# Altium PCB STM32_PCB.PcbDoc
Units mm, origin at the board's own origin, x right, y up, seen from the top; angles counter-clockwise.
Board outline 35 x 36 mm, 4 copper layers (L1 (SIGNAL), L2 (GND), L3 (GND), L4 (SIGNAL)), stack 1.57 mm thick; 35 components, 27 nets, 172 pads, 109 vias.
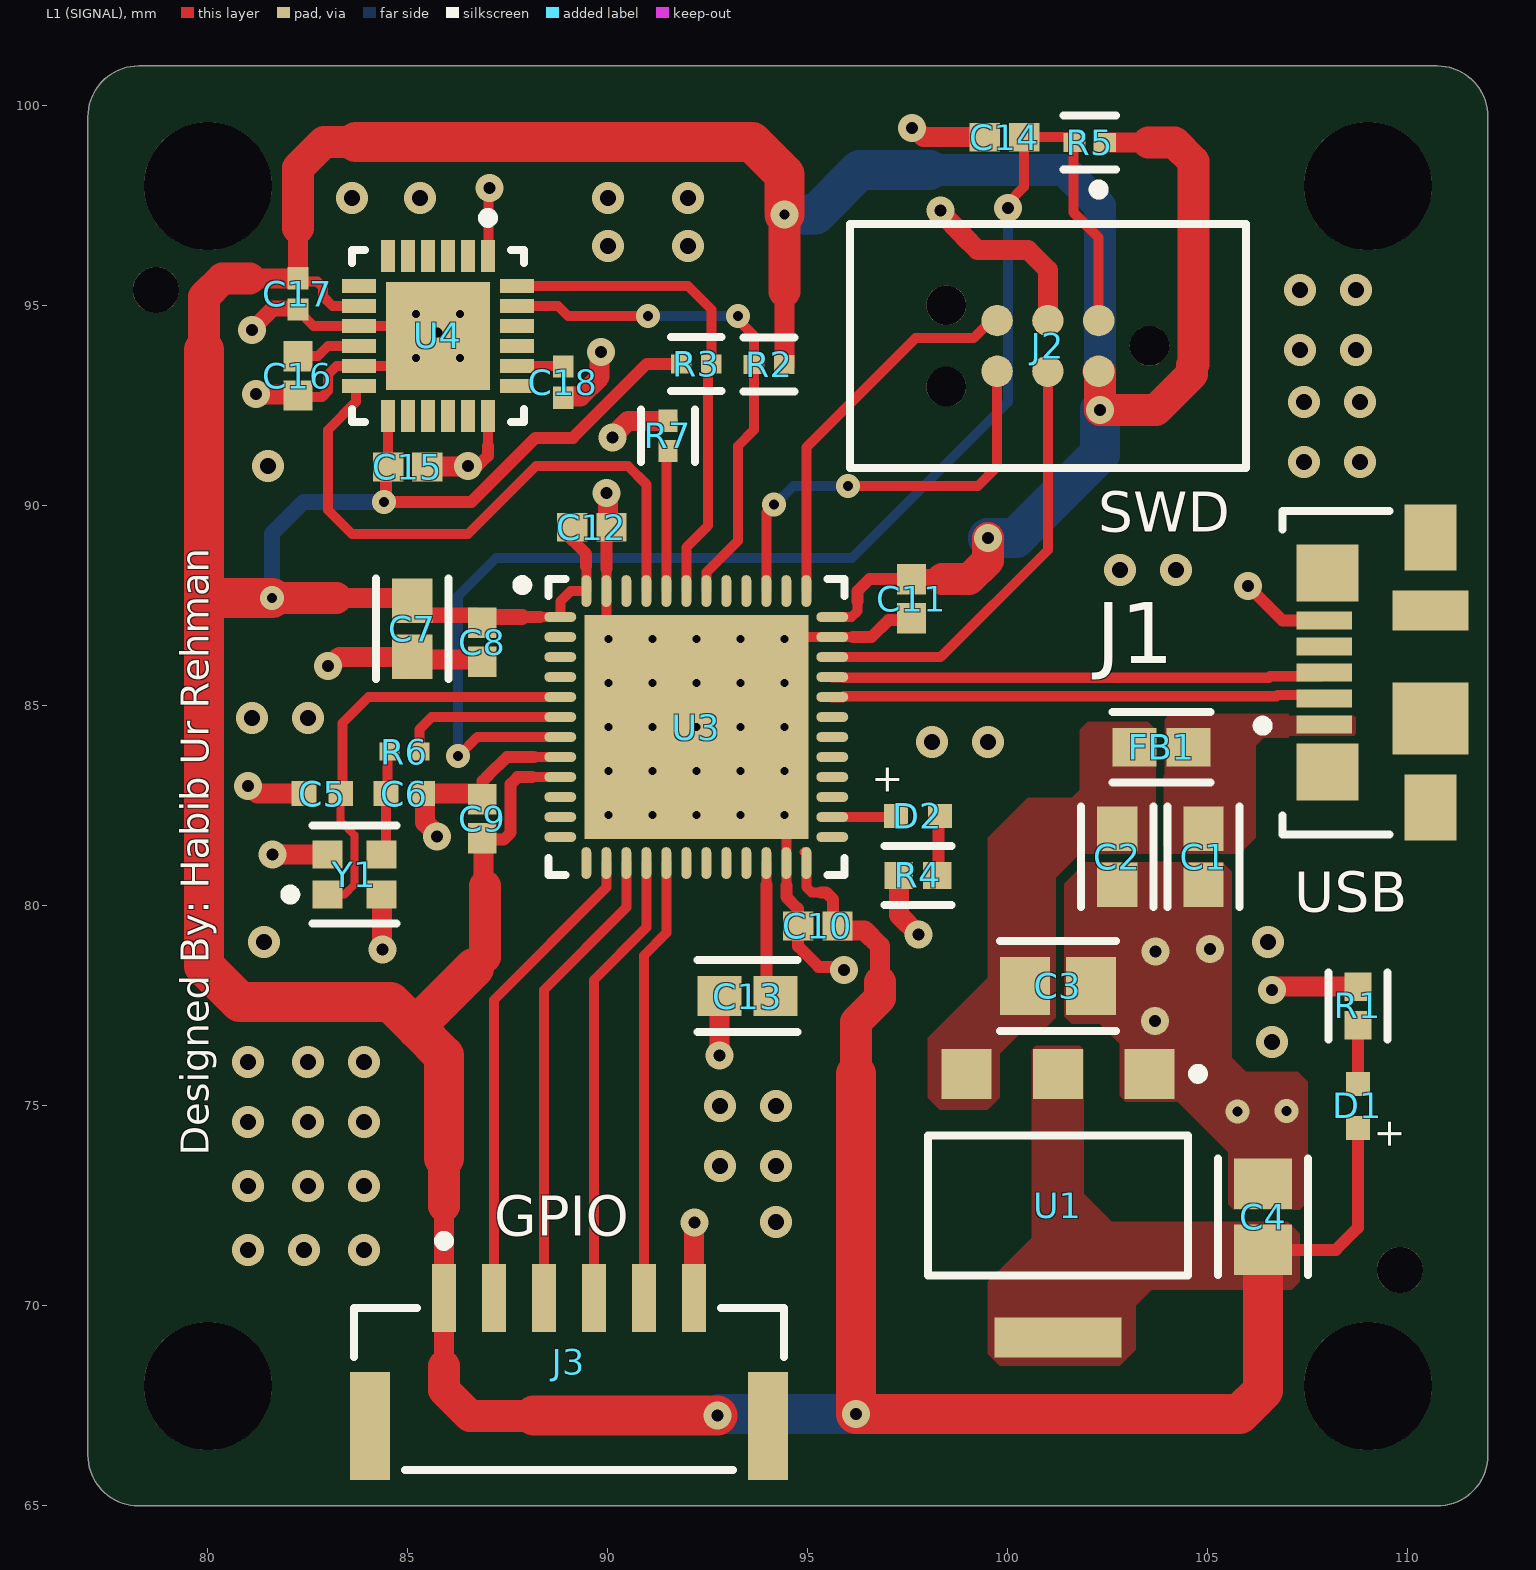
[diagram p0: L1 (SIGNAL) view]
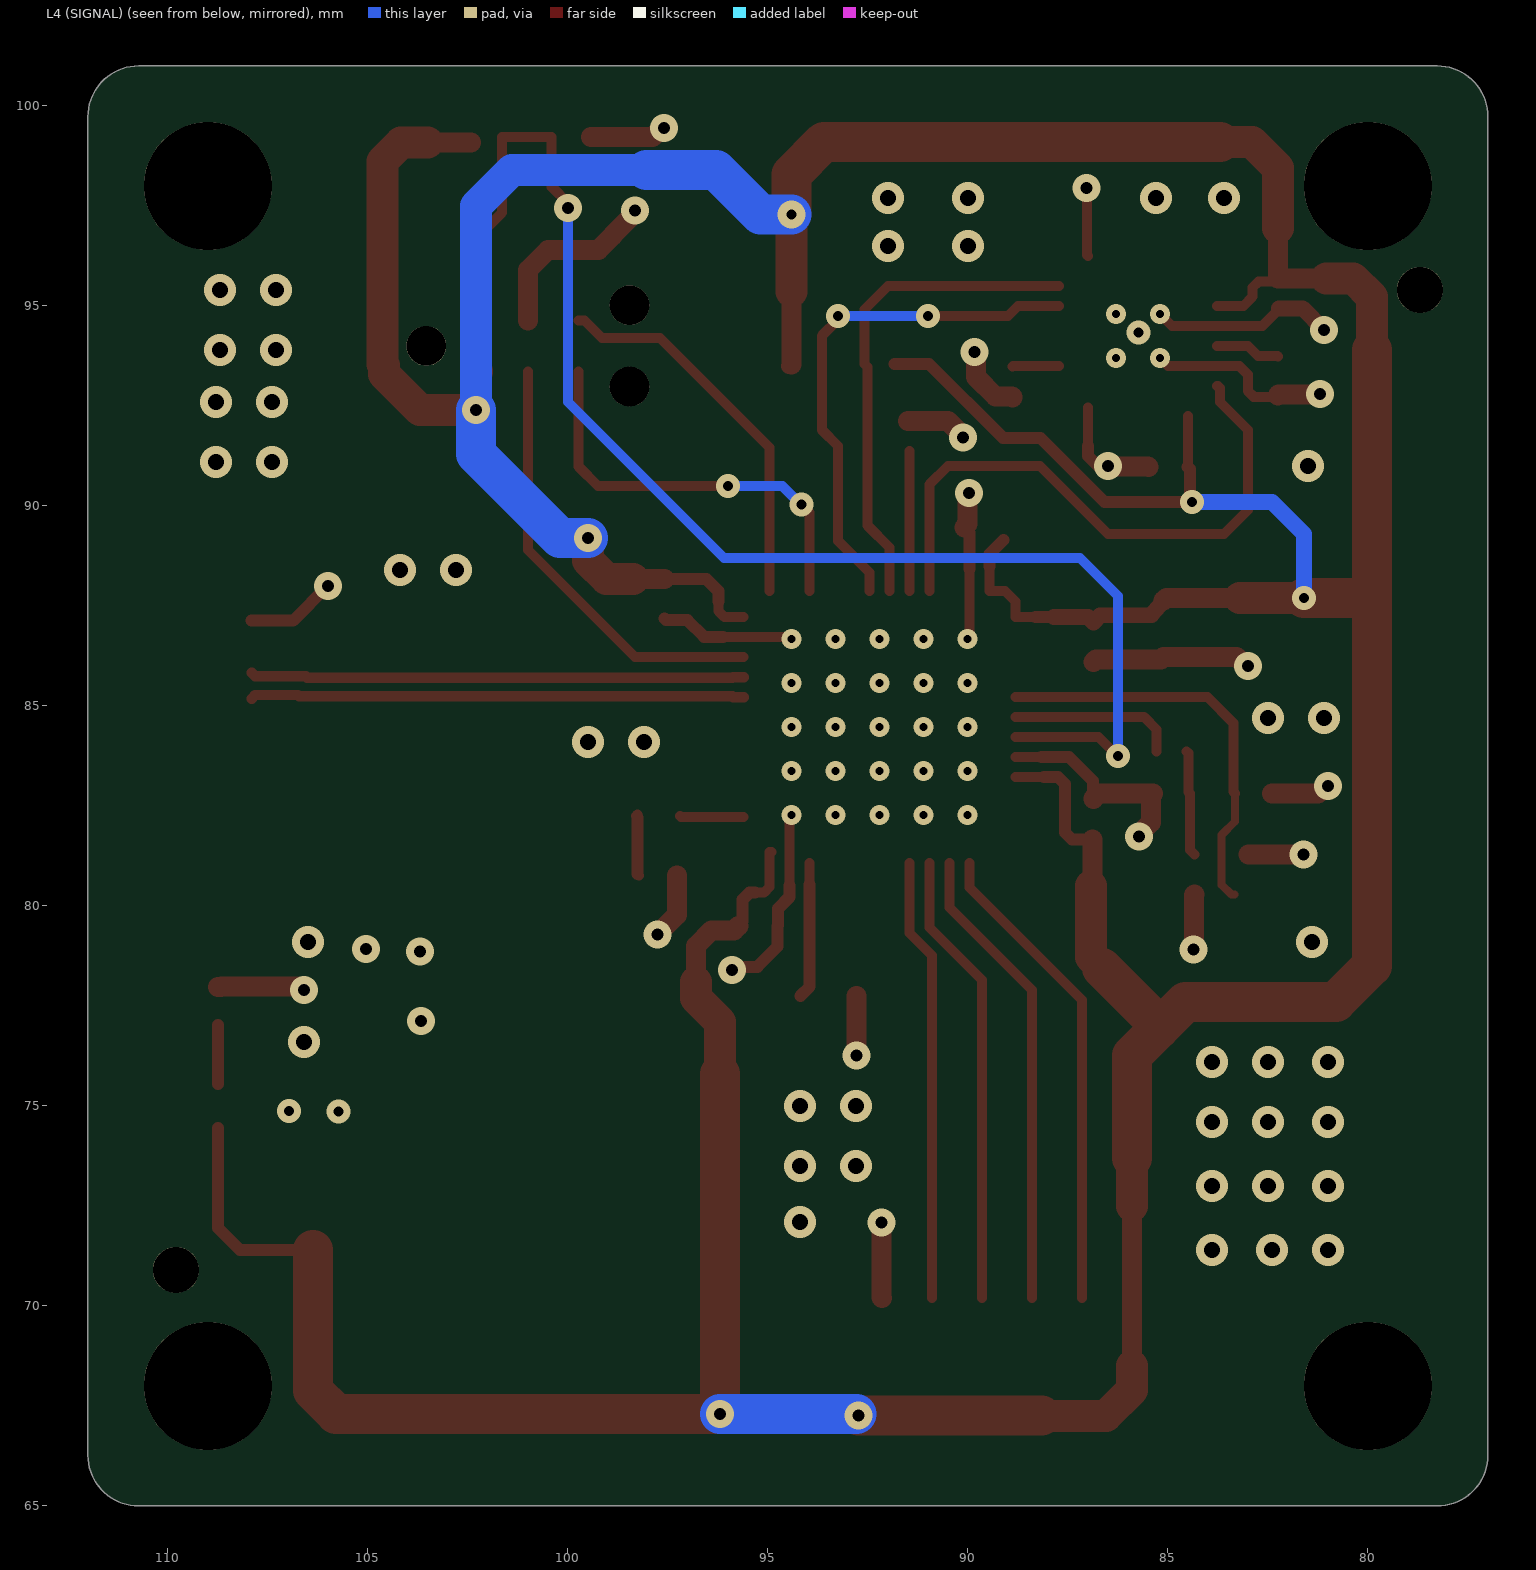
[diagram p1: L4 (SIGNAL) view, seen from below]
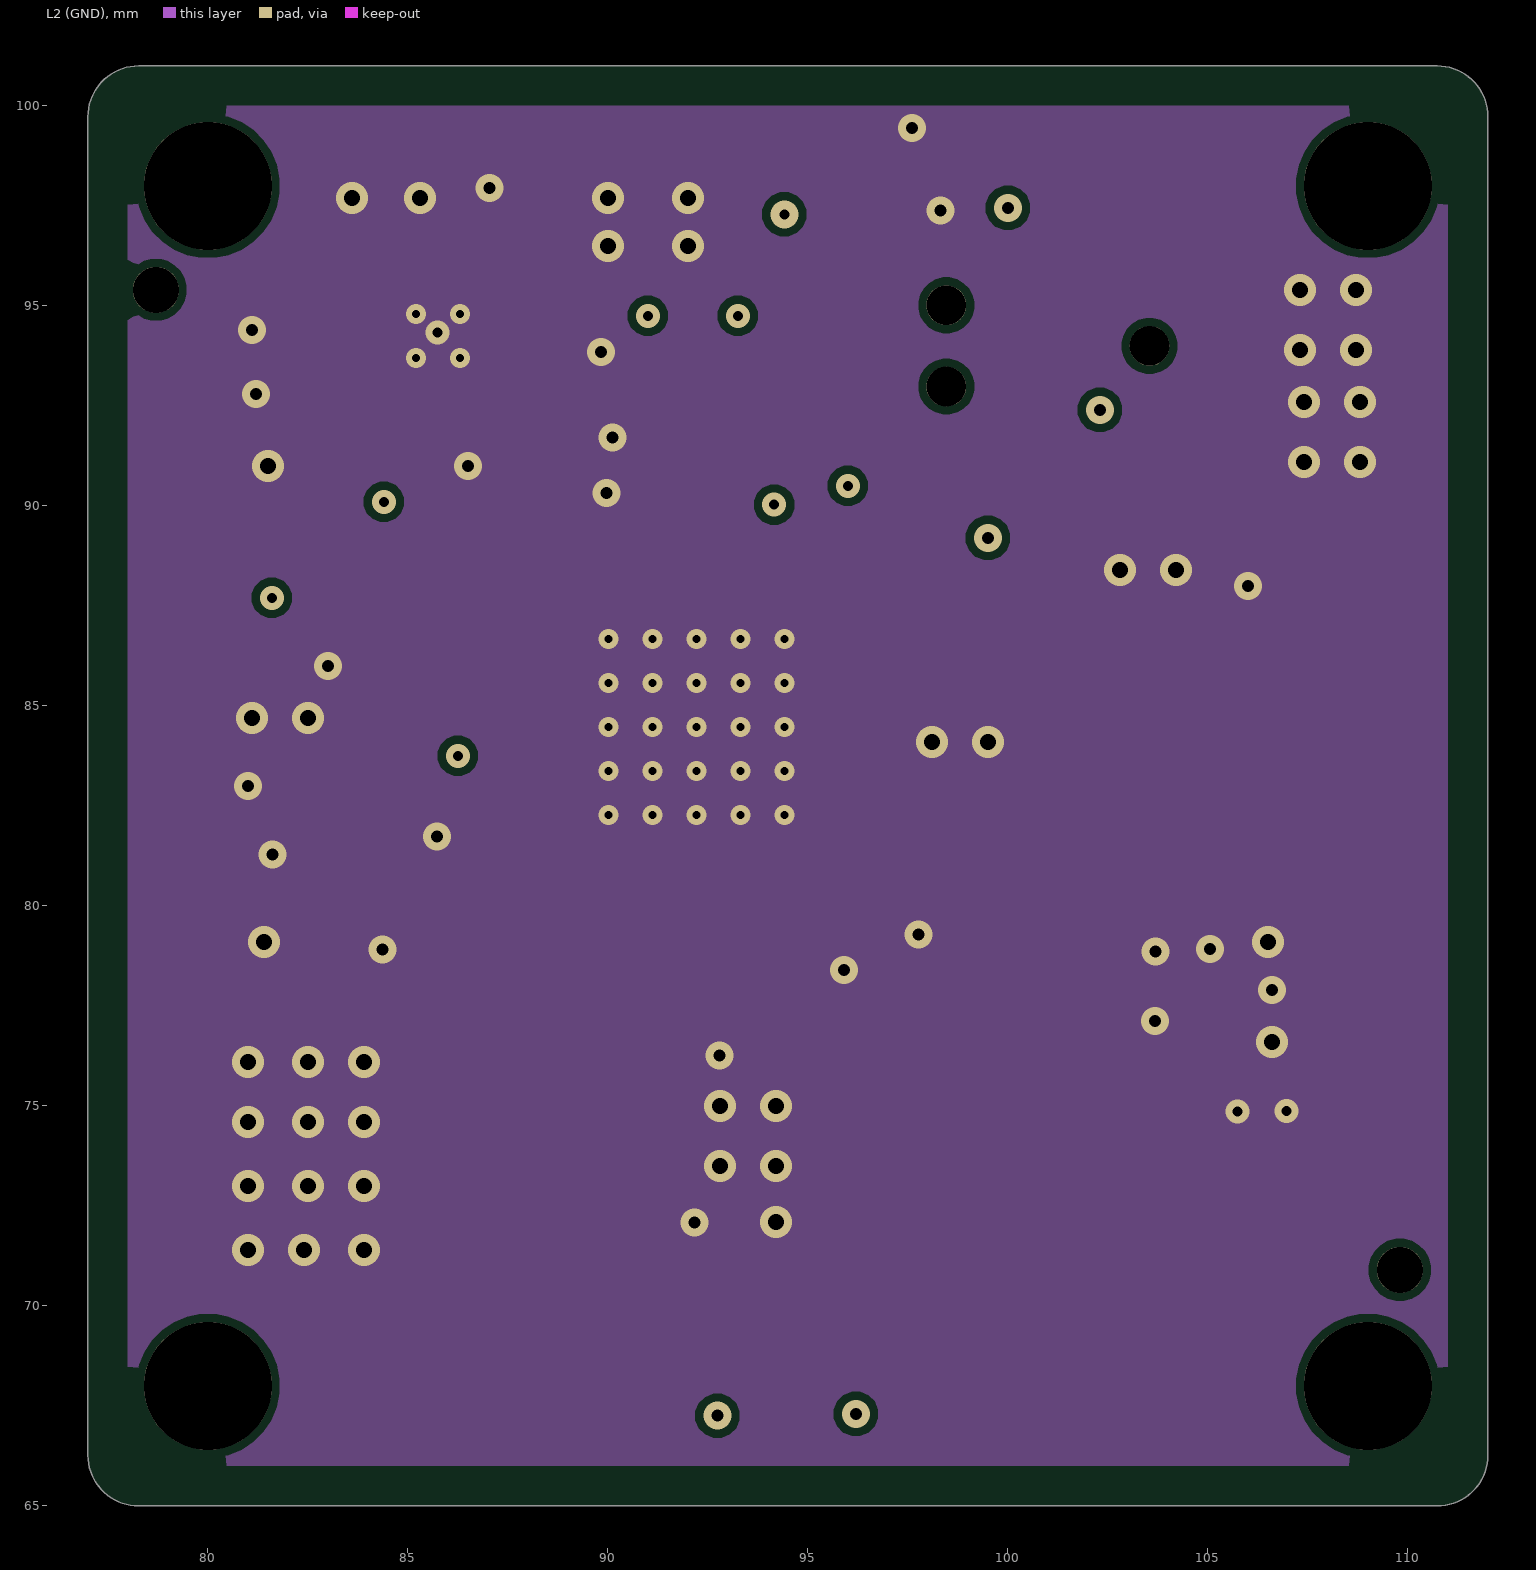
[diagram p2: L2 (GND)]
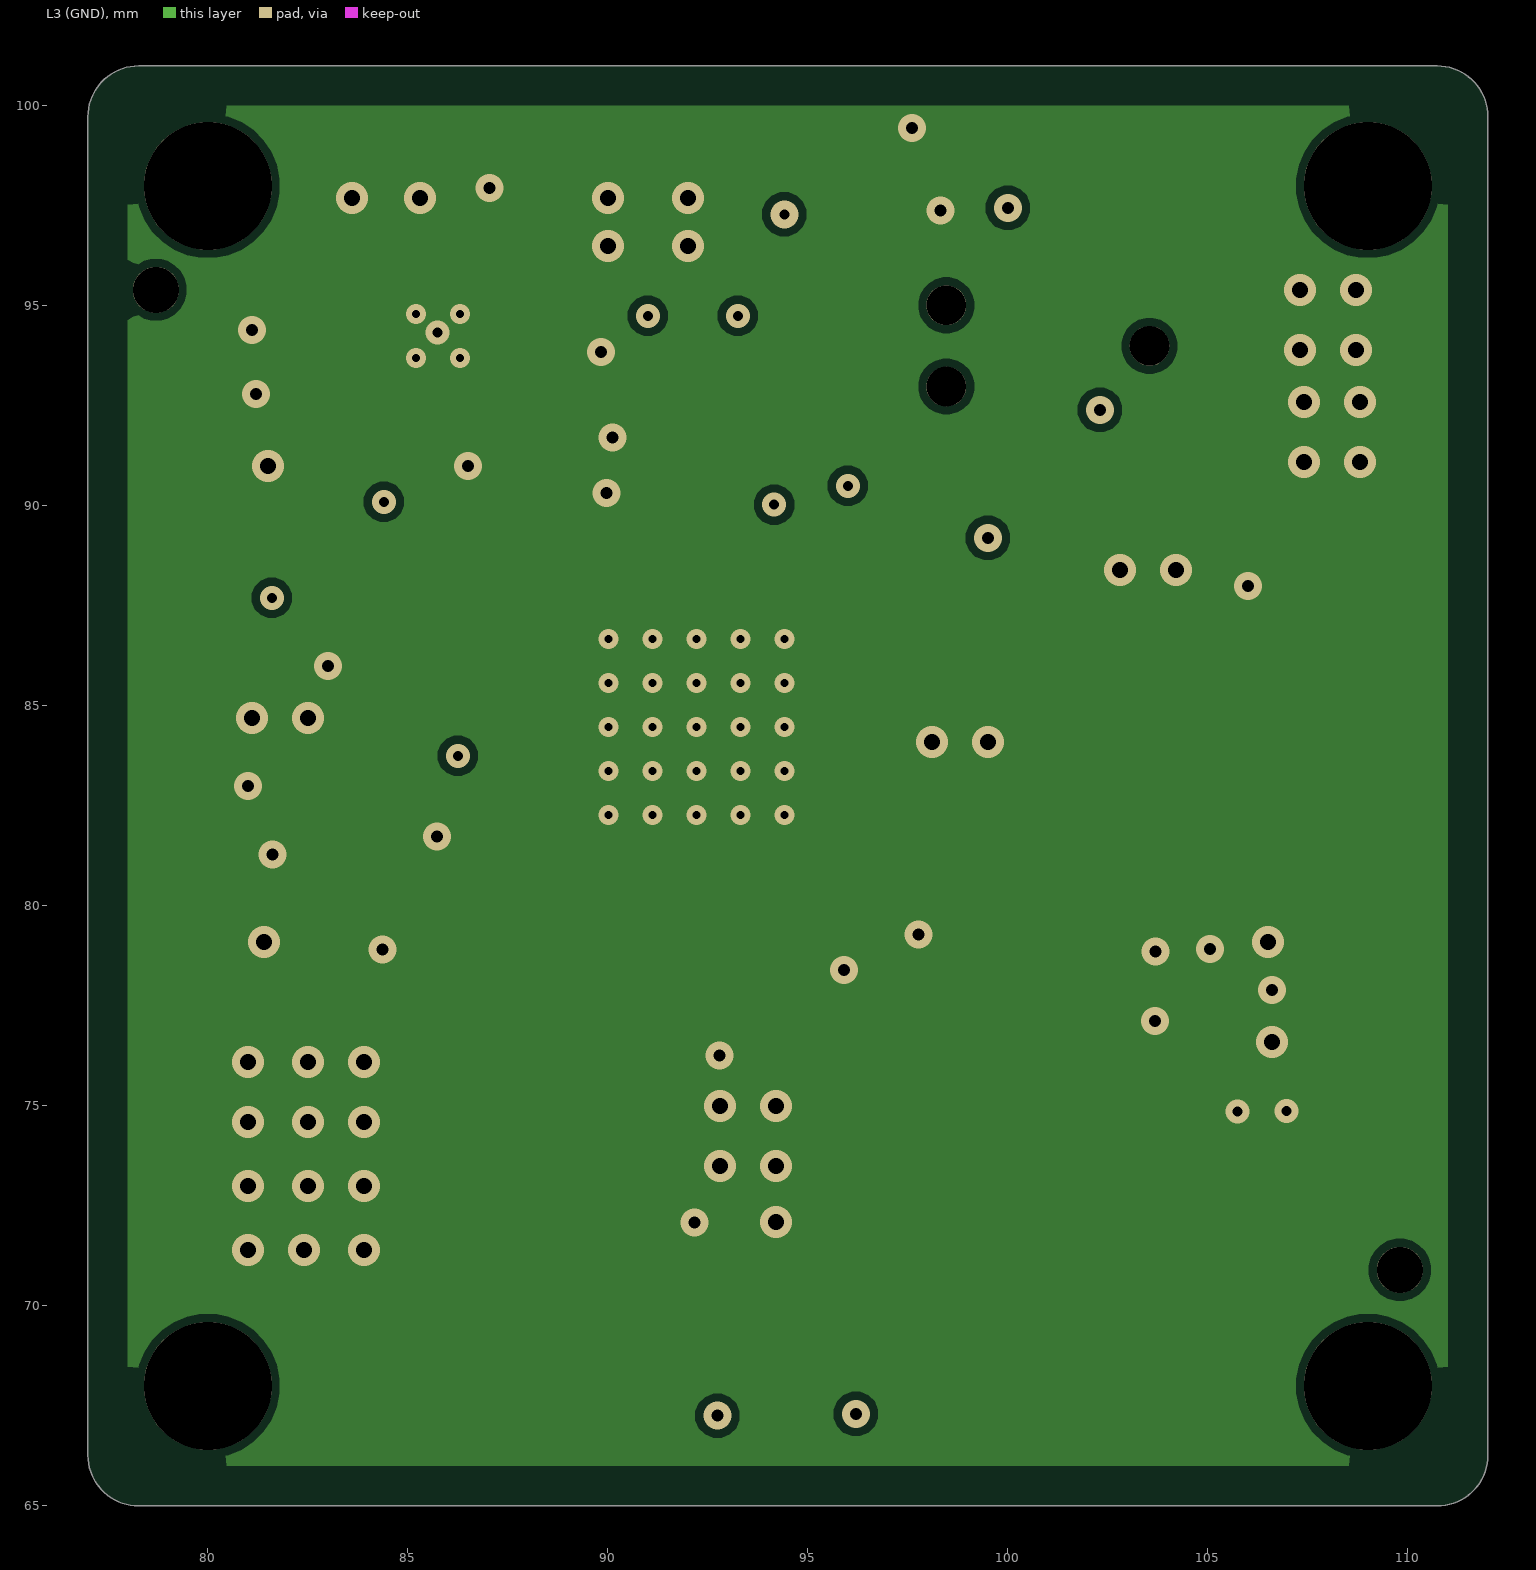
[diagram p3: L3 (GND)]
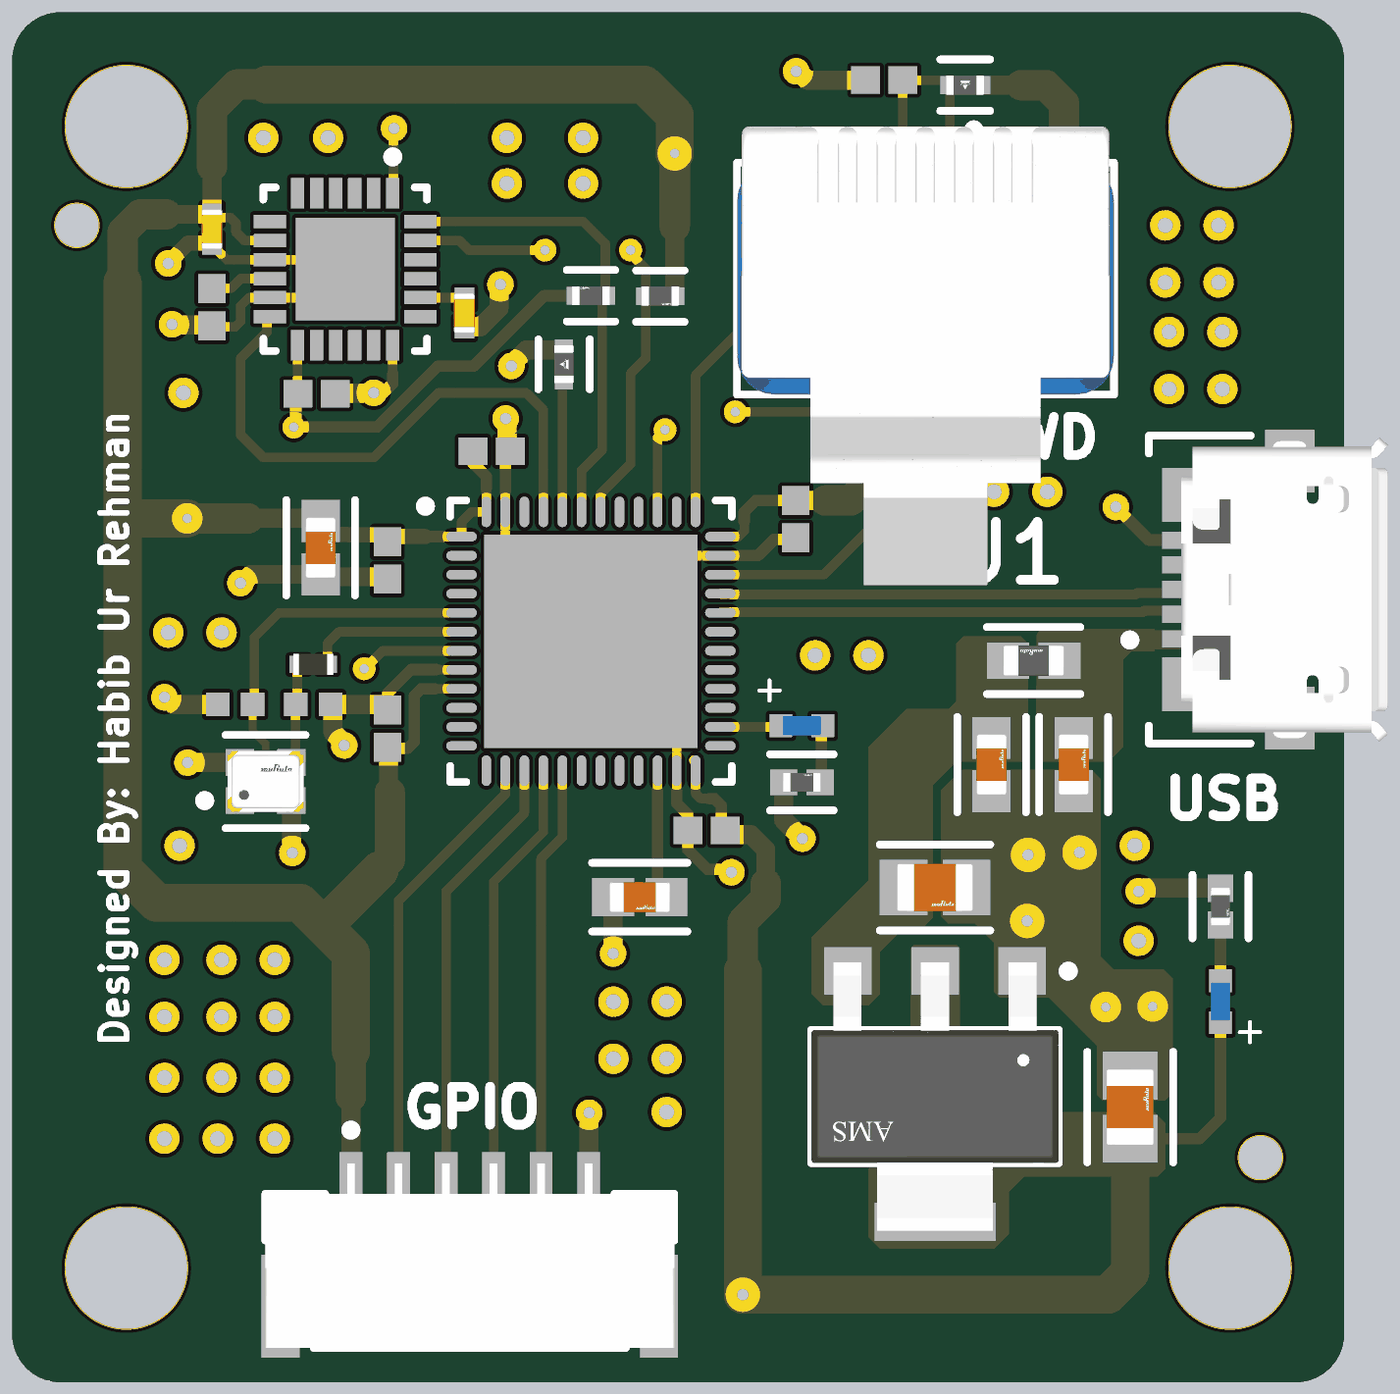
[diagram p4: 3D render of the assembled board from above, using the file's embedded part models]

## Layer stack, top to bottom
Top Solder: solder mask 0.0254, SM-001, Dk 4
L1 (SIGNAL): signal copper 0.035
Dielectric 1: prepreg 0.2, PP-017, Dk 4.6
L2 (GND): signal copper 0.0175
Dielectric 3: core 1.065, Core-039, Dk 4.6
L3 (GND): signal copper 0.0175
Dielectric 5: prepreg 0.2, PP-017, Dk 4.6
L4 (SIGNAL): signal copper 0.035
Bottom Solder: solder mask 0.0254, SM-001, Dk 4

## Board outline
77,66.27 77,99.73 cw(c78.27,99.73) 78.27,101 110.73,101 cw(c110.73,99.73) 112,99.73 112,66.27 cw(c110.73,66.27) 110.73,65 78.27,65 cw(c78.27,66.27)

## Design rules (kind name [scope] priority, off if disabled: settings)
Clearance [All] p1: gap=0.2 ignorepadtopadclearanceinfootprint=TRUE
ComponentClearance [All] p1: gap=0.15 collisioncheckmode=3 verticalgap=0.15 showdistances=FALSE checkcomponentboundary=TRUE
DiffPairsRouting [All] p1: maxlimit=0.254 minlimit=0.203 mostfreqgap=0.254 toplayer_maxgap=0.203 toplayer_prefgap=0.203 toplayer_minwidth=0.26 toplayer_maxwidth=0.26 toplayer_prefwidth=0.26 bottomlayer_maxgap=0.203 bottomlayer_prefgap=0.203 bottomlayer_minwidth=0.26 bottomlayer_maxwidth=0.26 bottomlayer_prefwidth=0.26 impedanceprofiledriven=TRUE impedanceprofileid={6A975162-37C4-4A61-BB08-4E133F459BDD} impedanceprofilevalue=90.000000 maxuncoupledlength=12.7
MinimumSolderMaskSliver Fine_Pitch [HasFootprint('IS-QFN-24_V') vs HasFootprint('STM-UFQFPN48_L')] p1: minsoldermaskwidth=0.047
MinimumSolderMaskSliver [All] p2: minsoldermaskwidth=0.08
PolygonConnect [All] p1: connectstyle=Direct reliefconductorwidth=0.254 reliefentries=4 polygonreliefangle="90 Angle" airgapwidth=0.254
RoutingVias [All] p1: holewidth=0.3 width=0.7 viastyle="Through Hole" minholewidth=0.25 minwidth=0.55 maxholewidth=0.4 maxwidth=0.9
SolderMaskExpansion [All] p1: expansion=0.102 istentingtop=FALSE
SupplyNets "Schematic Supply Nets_3" [InNet('+3V3')] p1: voltage=0.000
SupplyNets "Schematic Supply Nets_2" [InNet('GND')] p2: voltage=0.000
SupplyNets "Schematic Supply Nets_1" [InNet('+5')] p3: voltage=0.000
SupplyNets "Schematic Supply Nets" [InNet('VBUS')] p4: voltage=0.000
Width [All] p1: maxlimit=1 minlimit=0.2 preferedwidth=0.3 midlayer1_minwidth=0.254 midlayer1_maxwidth=0.254 midlayer1_prefwidth=0.254 midlayer2_minwidth=0.254 midlayer2_maxwidth=0.254 midlayer2_prefwidth=0.254 minimp=50.000000 maximp=50.000000 favimp=50.000000
27 further rules are at their usual default settings.

## Classes and differential pairs
net class DIFF_USB: USB_D_N USB_D_P
differential pair USB_D: +USB_D_P -USB_D_N

## Components (designator, comment, footprint, x,y, rotation, side; value= is the part's Value field where it differs from the comment)
C1 "2u2" FP-GRM188-0_2-IPC_B 104.892,81.231 r90 top
C2 "2u2" FP-GRM188-0_2-IPC_B 102.736,81.231 r90 top
C3 "22uF" FP-GRM219-0_2-0_15-IPC_B 101.25,78 r0 top
C4 "22uF" FP-GRM219-0_2-0_15-IPC_B 106.378,72.229 r90 top
C5 "10p" CAPC1005X55X25NL05T05 82.859,82.81 r0 top
C6 "10p" CAPC1005X55X25NL05T05 84.909,82.81 r180 top
C7 "2.2u" FP-GRM188-0_2-IPC_B 85.105,86.93 r90 top
C8 "100n" CAPC1050X55X23ML05T13 86.859,86.593 r90 top
C9 "100n" CAPC1050X55X23ML05T13 86.859,82.177 r270 top
C10 "100n" CAPC1050X55X23ML05T13 95.25,79.5 r0 top
C11 "100n" CAPC1050X55X23ML05T13 97.59,87.68 r90 top
C12 "100n" CAPC1050X55X23ML05T13 89.599,89.464 r180 top
C13 "2u2" FP-GRM188-0_2-IPC_B 93.491,77.747 r0 top
C14 "100n" CAPC1050X55X23ML05T13 99.915,99.217 r0 top
C15 "100n" CAPC1050X55X23ML05T13 84.995,90.975 r180 top
C16 "100n" CAPC1050X55X23ML05T13 82.25,93.25 r270 top
C17 "10n" CAPC1005X55X25LL05T10 82.25,95.3 r90 top
C18 "2n2" CAPC1005X55X25LL05T10 88.883,93.094 r90 top
D1 "150040VS73240" WL-SMCC_0402_L1W0.5H0.4 108.75,75 r270 top
D2 "150040VS73240" WL-SMCC_0402_L1W0.5H0.4 97.75,82.25 r180 top
FB1 "120R" FP-BLM18-0_15-t0_8-IPC_B 103.841,83.963 r180 top
J1 "473460001" FP-473460001-MFG 110.219,85.83 r90 top
J2 "TC2030-MCP-NL" FP-TC2030-MCP-NL-MFG 101,94 r180 top
J3 "SM06B-GHS-TB(LF)(SN)" FP-SM06B-GHS-TB_LF_SN-MFG 89.025,67.925 r0 top
R1 "1K" FP-RC0402-0_4-IPC_A 108.75,77.5 r270 top
R2 "2K2" FP-AC0402-IPC_C 94.031,93.54 r0 top
R3 "2K2" FP-AC0402-IPC_C 92.208,93.552 r180 top
R4 "1K" FP-RC0402-0_4-IPC_A 97.75,80.764 r0 top
R5 "10K" FP-CRCW0402-C-e3-IPC_C 102.042,99.085 r0 top
R6 "0R" RESC1005X40X25LL05T10 84.909,83.86 r0 top
R7 "10K" FP-CRCW0402-C-e3-IPC_C 91.5,91.75 r270 top
U1 "AMS1117-3.3" FP-AMS1117-IPC_C 101.25,72.508 r270 top
U3 "STM32F411CEU6" STM-UFQFPN48_L 92.209,84.471 r0 top
U4 "MPU-6050" IS-QFN-24_V 85.75,94.25 r270 top
Y1 "24MHz" FP-XRCGB_F_N-MFG 83.659,80.784 r0 top

## Footprints (in the part's own frame and the unit in brackets; to place one, negate y for a bottom-side part, rotate by r counter-clockwise, add the part's x,y. Pads: shape width x height; smd on the part's side, far side on the other; paste and mask are expansions set on the pad)
CAPC1005X55X25LL05T10 [mm] "Chip Capacitor, 2-Leads, Body 1.05x0.55mm, IPC High Density"
  rect 0.56x0.52 smd: 1(-0.39,0) 2(0.39,0)
  body extent -0.53,-0.28 0.53,0.28, height 0.55
CAPC1005X55X25NL05T05 [mm] "Chip Capacitor, 2-Leads, Body 1.00x0.50mm, IPC Medium Density"
  rect 0.62x0.62 smd: 1(-0.46,0) 2(0.46,0)
  body extent -0.53,-0.28 0.53,0.27, height 0.55
CAPC1050X55X23ML05T13 [mm] "Chip Capacitor, 2-Leads, Body 1.05x0.55mm, IPC Low Density"
  rect 0.76x0.72 smd: 1(-0.49,0) 2(0.49,0)
  body extent -0.53,-0.28 0.53,0.27, height 0.55
FP-473460001-MFG [mm]
  rect 0.45x1.38 smd paste+0 mask+0: 1(-1.3,2.31) 2(-0.65,2.31) 3(0,2.31) 4(0.65,2.31) 5(1.3,2.31)
  rect 1.425x1.55 smd paste+0 mask+0: 6(-2.488,2.225) 7(2.488,2.225)
  rect 1.65x1.3 smd paste+0 mask+0: 8(-3.375,-0.35) 11(3.375,-0.35)
  rect 1.8x1.9 smd paste+0 mask+0: 9(-1.15,-0.35)
  rect 1x1.9 smd paste+0 mask+0: 10(1.55,-0.35)
  silkscreen extent -4.05,0.67 4.05,3.97, body extent -4.3,-2.48 4.3,3.45, height 0.25
FP-AC0402-IPC_C [mm]
  rect 0.515x0.472 smd paste+0 mask+0: 1(-0.379,0) 2(0.379,0)
  silkscreen extent -0.64,-0.67 0.64,0.67, body extent -0.74,-0.38 0.74,0.38, height 0.25
FP-AMS1117-IPC_C [mm]
  rect 1.25x1.25 smd paste+0 mask+0: 1(-3.295,2.29) 2(-3.295,0) 3(-3.295,-2.29)
  rect 1.004x3.182 smd paste+0 mask+0: 4(3.295,0)
  silkscreen extent -3.42,-3.25 1.75,3.63, body extent -3.9,-3.35 3.9,3.35, height 0.25
FP-BLM18-0_15-t0_8-IPC_B [mm]
  rect 1.106x0.958 smd paste+0 mask+0: 1(-0.676,0) 2(0.676,0)
  silkscreen extent -1.23,-0.88 1.23,0.88, body extent -1.48,-0.73 1.48,0.73, height 0.25
FP-CRCW0402-C-e3-IPC_C [mm]
  rect 0.56x0.472 smd paste+0 mask+0: 1(-0.376,0) 2(0.376,0)
  silkscreen extent -0.66,-0.67 0.66,0.67, body extent -0.76,-0.38 0.76,0.38, height 0.25
FP-GRM188-0_2-IPC_B [mm]
  rect 1.105x1.006 smd paste+0 mask+0: 1(-0.701,0) 2(0.701,0)
  silkscreen extent -1.25,-0.9 1.25,0.9, body extent -1.5,-0.75 1.5,0.75, height 0.25
FP-GRM219-0_2-0_15-IPC_B [mm]
  rect 1.255x1.456 smd paste+0 mask+0: 1(-0.826,0) 2(0.826,0)
  silkscreen extent -1.45,-1.13 1.45,1.13, body extent -1.7,-0.98 1.7,0.98, height 0.25
FP-RC0402-0_4-IPC_A [mm]
  rect 0.715x0.672 smd paste+0 mask+0: 1(-0.479,0) 2(0.479,0)
  silkscreen extent -0.84,-0.74 0.84,0.74, body extent -1.04,-0.54 1.04,0.54, height 0.25
FP-SM06B-GHS-TB_LF_SN-MFG [mm]
  rect 0.6x1.7 smd paste+0 mask+0: 1(-3.125,2.275) 2(-1.875,2.275) 3(-0.625,2.275) 4(0.625,2.275) 5(1.875,2.275) 6(3.125,2.275)
  rect 1x2.7 smd paste+0 mask+0: 7(-4.975,-0.925) 8(4.975,-0.925)
  silkscreen extent -5.38,-2.02 5.38,3.82, body extent -5.58,-2.37 5.58,3.22, height 0.25
FP-TC2030-MCP-NL-MFG [mil]
  round 30.98 smd paste-39370.1 mask+0: 1(-50,-25) 2(-50,25) 3(0,-25) 4(0,25) 5(50,-25) 6(50,25)
  round 39.02 hole 39.02 unplated paste-99999 mask+0: ""(-100,0) ""(100,-40) ""(100,40)
  silkscreen extent -195,-159 195,120, body extent -199,-124 199,124, height 10
FP-XRCGB_F_N-MFG [mm]
  rect 0.75x0.7 smd paste+0 mask+0: 1(-0.675,-0.5) 2(0.675,-0.5) 3(0.675,0.5) 4(-0.675,0.5)
  silkscreen extent -1.72,-1.22 1.05,1.22, body extent -1.15,-0.95 1.15,0.95, height 0.25
IS-QFN-24_V [mm] "QFN, 24-Leads, Body 4x4mm, Pitch 0.5mm, Thermal Pad 2.7x2.6mm"
  rect 0.8x0.35 smd: 1(-2,1.25) 2(-2,0.75) 3(-2,0.25) 4(-2,-0.25) 5(-2,-0.75) 6(-2,-1.25) 13(2,-1.25) 14(2,-0.75) 15(2,-0.25) 16(2,0.25) 17(2,0.75) 18(2,1.25)
  rect 0.35x0.85 smd mask+0.102: 7(-1.25,-1.975) 8(-0.75,-1.975) 9(-0.25,-1.975) 10(0.25,-1.975) 11(0.75,-1.975) 12(1.25,-1.975) 19(1.25,1.975) 20(0.75,1.975) 21(0.25,1.975) 22(-0.25,1.975) 23(-0.75,1.975) 24(-1.25,1.975)
  rect 2.7x2.6 smd: 25(0,0)
  silkscreen extent -3.07,-2.15 2.15,2.15, body extent -2,-2 2,2, height 0.95
RESC1005X40X25LL05T10 [mm] "Chip Resistor, 2-Leads, Body 1.05x0.55mm, IPC High Density"
  rect 0.5x0.45 smd: 1(-0.375,0) 2(0.375,0)
  body extent -0.53,-0.28 0.53,0.28, height 0.4
STM-UFQFPN48_L [mm] "QFN, 48-Leads, Body 7.1x7.1mm, Pitch 0.5mm, Thermal Pad 5.6x5.6mm, IPC High Density"
  oval 0.8x0.25 smd: 1(-3.4,2.75) 2(-3.4,2.25) 3(-3.4,1.75) 4(-3.4,1.25) 5(-3.4,0.75) 6(-3.4,0.25) 7(-3.4,-0.25) 8(-3.4,-0.75) 9(-3.4,-1.25) 10(-3.4,-1.75) 11(-3.4,-2.25) 12(-3.4,-2.75) 25(3.4,-2.75) 26(3.4,-2.25) 27(3.4,-1.75) 28(3.4,-1.25) 29(3.4,-0.75) 30(3.4,-0.25) 31(3.4,0.25) 32(3.4,0.75) 33(3.4,1.25) 34(3.4,1.75) 35(3.4,2.25) 36(3.4,2.75)
  oval 0.25x0.8 smd: 13(-2.75,-3.4) 14(-2.25,-3.4) 15(-1.75,-3.4) 16(-1.25,-3.4) 17(-0.75,-3.4) 18(-0.25,-3.4) 19(0.25,-3.4) 20(0.75,-3.4) 21(1.25,-3.4) 22(1.75,-3.4) 23(2.25,-3.4) 24(2.75,-3.4) 37(2.75,3.4) 38(2.25,3.4) 39(1.75,3.4) 40(1.25,3.4) 41(0.75,3.4) 42(0.25,3.4) 43(-0.25,3.4) 44(-0.75,3.4) 45(-1.25,3.4) 46(-1.75,3.4) 47(-2.25,3.4) 48(-2.75,3.4)
  rect 5.6x5.6 smd: 49(0,0)
  silkscreen extent -4.47,-3.7 3.7,3.7, body extent -3.55,-3.55 3.55,3.55, height 0.6
WL-SMCC_0402_L1W0.5H0.4 [mm] "SMD Mono-color Chip LED Compact, body 1x0.5mm"
  rect 0.6x0.6 smd: 1(-0.55,0) 2(0.55,0)
  body extent -0.5,-0.25 0.5,0.25, height 0.4

## Part data
C1 C2 C7 C13: library part CMP-06035-000124-3, "CAP CER 2.2UF 16V X7S 0603", Capacitance=2.2uF, Case Code (Imperial)=0603, Case Code (Metric)=1608, Dielectric=X7S, Max Operating Temperature=125°C, Min Operating Temperature=-55°C, Package Quantity=4000, Resistor Type=Ceramic, Tolerance=10%, Voltage Rating=16V, Case/Package=0603, Depth=0.8mm, Height=0.8mm, Length=1.6mm, Mount="Surface Mount", Packaging="Tape and Reel", Termination=SMD/SMT, Thickness=0.039inch, Voltage Rating (DC)=16V, Weight=0.000222oz, Width=0.031inch
C3 C4: library part CMP-06035-014527-1, "Chip Multilayer Ceramic Capacitors for General Purpose, 0805, 22uF, X5R, 15%, 20%, 16V", Dielectric=X5R, Tolerance=20%, Voltage Rating (DC)=16V, Capacitance=22uF, Length=2mm, Thickness=850um, Width=1.25mm
C5 C6: library part CMP-2008-01705-1, Manufacturer=Vitramon, Part Number=VJ0402A100FXQCW1BC
C8 C9 C10 C11 C12 C14 C15 C16: library part CMP-2000-05439-1, "Chip Capacitor, 100 nF, +/- 10%, 16 V, -55 to 125 degC, 0402 (1005 Metric), RoHS, Tape and Reel", Capacitance=100000pF, Case Size/Dimension=0402, Dielectric=X7R, Manufacturer="Samsung Electro-Mechanics", Rated Voltage=16V, Tolerance (%)=±10%, ComponentLink1Description="New link", Datasheet URL=https://datasheet.ciiva.com/29198/458718-da-01-en-vs-kondensator-0402-29198423.pdf, Datasheet Version=Nov-10, Manufacturer URL=http://www.samsungsem.com/global/index.jsp
C17: library part CMP-2000-06332-1, "Chip Capacitor, 10 nF, 16 V, 10%, -55 to 125 degC, 0402 (1005 Metric), RoHS, Tape and Reel", Capacitance=10000pF, Case Size/Dimension=0402, Dielectric=X7R, Manufacturer=Murata, Package Description="2-Pin Surface Mount Device, Body 1 x 0.5 mm", Rated Voltage=16V, Tolerance (%)=±10%, Datasheet URL=http://psearch.en.murata.com/capacitor/product/GRM155R71C103KA01%23.pdf, Datasheet Version=06/2016, Manufacturer URL=http://www.murata.com/, Mounting Technology=SurfaceMount, Package Reference=0402
C18: library part CMP-2000-06332-1, "Chip Capacitor, 2.2nF, 16 V, 10%, -55 to 125 degC, 0402 (1005 Metric), RoHS, Tape and Reel", Capacitance=2.2nF, Case Size/Dimension=0402, Dielectric=X7R, Manufacturer=Murata, Package Description="2-Pin Surface Mount Device, Body 1 x 0.5 mm", Rated Voltage=16V, Tolerance (%)=±10%, Datasheet URL=http://psearch.en.murata.com/capacitor/product/GRM155R71C103KA01%23.pdf, Datasheet Version=06/2016, Manufacturer URL=http://www.murata.com/, Mounting Technology=SurfaceMount, Package Reference=0402
D1 D2: library part CMP-03913-90235559-3, "Wurth Elektronik LED, WL-SMCC, 1005 (0402), 570 nm, 1 x 0.5 x 0.4mm", Case/Package=0402, Color=Green, Forward Current=60mA, Forward Voltage=2V, Manufacturer Lifecycle Status=ACTIVE, Max Junction Temperature (Tj)=95°C, Max Operating Temperature=85°C, Max Reverse Voltage (DC)=5V, Min Operating Temperature=-40°C, Power Dissipation=75mW, Dominant Wavelength=570nm, Height=400µm, Length=1mm, Lifecycle Status=Production, Luminous Intensity=50mcd, Packaging="Tape and Reel", Peak Wavelength=572nm, Reverse Voltage=5V, RoHS=Compliant, Viewing Angle=120°, Wavelength=570nm, Width=500µm, YEOL="1 = Estimated lifetime > 10 years"
FB1: library part CMP-0686-00439-3, "Chip Ferrite Bead, 0603, 120Ω @ 100MHz, 0.18Ω, 25%, 800mA", Case Code (Imperial)=0603, Case Code (Metric)=1608, Current Rating=500mA, DC Resistance (DCR)=180mR, Frequency=100MHz, Max Operating Temperature=125°C, Min Operating Temperature=-55°C, Package Quantity=1, Tolerance=25%, Case/Package=0603, Core Material=Ferrite, DC Current=500mA, DC Resistance-Max=180mR, Depth=0.8mm, Height=0.8mm, Impedance=120R, Lead Free="Lead Free", Length=1.6mm, Material=Steel, Max Current Rating=500mA, Max DC Current=500mA, Military Standard=Not, Number of Circuits=1, Number of Lines=1, Number of Pins=2, Packaging="Tape and Reel", Radiation Hardening=No, REACH SVHC="No SVHC", RoHS Compliant=Yes, Series=BLM18A, Shielding=Unshielded, Termination=SMD/SMT, Test Frequency=100MHz, Width=0.8mm
J1: library part CMP-2000-05246-2, "CONN RCPT USB2.0 MICRO B SMD R/A", Current Rating=1.8A, Manufacturer=Molex, Package=0, Temperature="-30°C to +85°C", Temperature Range High=+85°C, Temperature Range Low=-30°C, Voltage Rating=30V, Automotive=No, Category=Conn, ComponentLink2Description=Datasheet, ComponentLink2URL=https://www.molex.com/webdocs/datasheets/pdf/en-us/0473460001_IO_CONNECTORS.pdf, Conn Orientation="Right Angle", Contact Material=Gold,Nickel, Device Class L1=Connectors, Device Class L2="USB Connectors", Device Class L3=unset, Digikey Description="CONN RCPT USB2.0 MICRO B SMD R/A", Footprint Url=https://www.molex.com/pdm_docs/sd/473460001_sd.pdf, Height=2.945mm, Is Female=yes, Lead Free=Yes, Manufacturer Part Number=473460001, Number Of Contacts=5, Octopart=https://octopart.com/47346-0001-molex-7164928, Pitch=0.65mm, RoHS=TRUE, Shielding=true, Usb Standard="USB 2.0"
J2: library part CMP-205963-000002-1, "CABLE TAG-CONNECT IN-CIRCUIT", Package Quantity=1, Lead Free="Lead Free", Reach SVHC Compliant=Yes, RoHS Compliant=Yes, Series=-
J3: library part CMP-17439-000061-1, "CONN HEADER SMD R/A 6POS 1.25MM", Color=Natural, Contact Resistance=50mR, Current Rating=1A, Housing Color=Beige, Max Operating Temperature=85°C, Max Voltage Rating (AC)=50V, Min Operating Temperature=-25°C, Connector Type="Outer Shroud Contact", Contact Material=Bronze, Contact Plating=Tin, Depth=4.05mm, Fastening Type=Ramp, Housing Material=Polyamide, Lead Free="Lead Free", Length=10.75mm, Max Current Rating=1A, Mount="Surface Mount", Number Of Contacts=6, Number of Positions=6, Number of Rows=1, Orientation="Right Angle", Packaging="Tape and Reel", Pitch=1.25mm, Termination=Solder, Voltage Rating=50V
R1 R4: library part CMP-2002-07472-3, "RES 1K OHM 1% 1/16W 0402", Case Code (Imperial)=0402, Case Code (Metric)=1005, Max Operating Temperature=155°C, Max Power Dissipation=63mW, Min Operating Temperature=-55°C, Power Rating=62.5mW, Resistance=1kR, Resistance Tolerance=1%, Resistor Type="Thick Film", Temperature Coefficient=100ppm/°C, Voltage Rating=50V, Case/Package=0402, Construction=Rectangular, Depth=0.5mm, Features="Moisture Resistant", Height=0.32mm, Lead Free="Lead Free", Length=1mm, Military Standard=Not, Number of Pins=2, Number of Terminations=2, Packaging="Tape and Reel", Reach SVHC Compliant=Yes, RoHS Compliant=Yes, Series=RC, Size Code=0402, Technology="THICK FILM", Termination=SMD/SMT, Tolerance=1%, Voltage Rating (DC)=50V, Width=0.5mm
R2 R3: library part CMP-03412-048432-1, "RES 2.2kΩ ±1% 0.125W 0402"
R5 R7: library part CMP-02407-012085-1, "RES 10K OHM 1% 1/16W 0402", Case/Package=Molded, Max Operating Temperature=155°C, Min Operating Temperature=-55°C, Power Rating=62.5mW, Resistance=10kR, Resistor Type="Thick Film", Temperature Coefficient=100ppm/°C, Tolerance=1%, Contact Plating=Tin, Lead Free="Lead Free", Length=1mm, Mount="Surface Mount", RoHS Compliant=Yes, Termination=Wraparound
R6: library part CMP-2000-06964-1, "Chip Resistor, 0 Ohm, +/- 5%, -55 to 125 degC, 0402 (1005 Metric), RoHS, Tape and Reel", Manufacturer="Samsung Electro-Mechanics", Package Description="2-Pin Surface Mount Device, Body 1 x 0.5 mm", Package Reference=0402, Rated Power=0.063W, Resistance=0O, Temp Coefficient=±200ppm/°C, Tolerance (%)=±5%, Datasheet URL=https://datasheet.ciiva.com/15196/getdatasheetpartid-499011-15196236.pdf, Datasheet Version=11/2010, Manufacturer URL=http://www.samsungsem.com/global/index.jsp, Mounting Technology=SurfaceMount, Size Code=0402
U1: library part CMP-209535-000001-1, "LDO Voltage Regulators 1A, 3.3V", Dropout Voltage=1.1V, Manufacturer="Advanced Monolithic Systems", Max Junction Temp=+125°C, Max Power Dissipation=1.2W, Max Supply Voltage=15V, Nominal Supply Current=5mA, Output Current=1A, Output Voltage=3.3V, Package=AMS1117, Temperature="-40°C to +125°C", Temperature Range Low=-40°C, Automotive=No, Category=IC, ComponentLink2Description=Datasheet, ComponentLink2URL=http://www.advanced-monolithic.com/pdf/ds1117.pdf, Device Class L1="Integrated Circuits (ICs)", Device Class L2="Power Management ICs", Device Class L3="Voltage Regulators - Linear", Height=1.8mm, Ipc Land Pattern Name=SOT229P700X180-4, Lead Free=Yes, Manufacturer Part Number=AMS1117-3.3, Number Of Outputs=1, Octopart=https://octopart.com/ams1117-3.3-advanced+monolithic+systems-25899300, Output Type=Fixed, RoHS=TRUE, Standoff Height=0.64mm, Temperature Range High=+125°C
U3: library part CMP-0243-00165-1, "ARM Cortex-M4 32-bit MCU+FPU, 512 KB Flash, 128 KB RAM, 36 I/Os, 48-Pin UFQFPN, -40 to 85 degC, Tray", I/Os (High Current)=36, Operating Frequency(F) (Processor speed) (MHz)=100, Package Description=UFQFPN48, Package Reference="48-Pin Ultra Thin Fine Pitch Quad Flat No-Lead, 7 x 7 x 0.6 mm Body, 0.5 mm Pitch, Exposed Pad", Supply Voltage(Vcc) min (V)=1.7, ComponentLink1Description="Manufacturer URL", ComponentLink1URL=http://www.st.com/, ComponentLink2Description=Datasheet, ComponentLink2URL=http://www.st.com/st-web-ui/static/active/en/resource/technical/document/datasheet/DM00115249.pdf, Core="ARM Cortex-M4", DatasheetVersion="Rev. 6", FLASH Size (Prog) (kB)=512, Internal RAM Size (kB)=128, Mounting Technology="Surface Mount", Packing=Tray
U4: library part CMP-1753-00002-2, "3-Axis Gyroscope, Accelerometer and a Digital Motion Processor(TM) (DMP), 2.375 to 3.46 V, -40 to 85 degC, 24-Pin QFN, RoHS, Tape and Reel", Manufacturer=InvenSense, Standard Package=5,000, Category=Sensors,Transducers, Datasheet URL=http://datasheet.octopart.com/MPU-6050-InvenSense-datasheet-14421344.pdf, Datasheet Version="Rev. 3.3, 05/2012", Dynamic Catalog=MPU-6000™Series, Family=Multifunction, Featured Product=MPU-60506-Axis,IntegratedI²CSolution, Manufacturer URL=http://www.invensense.com/, Online Catalog=MPU-6000™Series, Other Names="1428-1007-2 / MPU6050", Output Type=Digital, Sensor Type=MotionTracking, Unit PriceUSD=Digital
Y1: library part CMP-06054-000017-1, "CRYSTAL 24.0000MHZ 6PF SMD", Case/Package=SMD/SMT, ESR (Equivalent Series Resistance)=150R, Frequency Stability=40ppm, Frequency Tolerance=30ppm, Load Capacitance=6pF, Max Operating Temperature=85°C, Min Operating Temperature=-30°C, Operating Frequency="24 MHz", Package Quantity=1, Depth=1.6mm, Frequency=24MHz, Height=0.028inch, Lead Free="Lead Free", Length=2mm, Mount="Surface Mount", Number of Pins=4, Packaging="Tape and Reel", REACH SVHC="No SVHC", RoHS Compliant=Yes, Series=XRCGB, Series Resistance=150R, Termination=SMD/SMT, Tolerance=30ppm, Width=1.6mm

## Free pads (board coordinates)
  round 3.2 hole 3.2: MH(80,68) MH(80,98) MH(109,68) MH(109,98)
  round 1.152 hole 1.152: TH(78.7,95.4) TH(109.8,70.9)

## Via types
v1: diameter 0.8, hole 0.4, L1 (SIGNAL) to L4 (SIGNAL), 41 vias
v2: diameter 0.5, hole 0.2, L1 (SIGNAL) to L4 (SIGNAL), 29 vias
v3: diameter 0.7, hole 0.3, L1 (SIGNAL) to L4 (SIGNAL), 28 vias
v4: diameter 0.6, hole 0.25, L1 (SIGNAL) to L4 (SIGNAL), 10 vias
v5: diameter 0.7, hole 0.25, L1 (SIGNAL) to L4 (SIGNAL), 1 vias

## Nets (pads, with @x,y where several pads share a name; then routed paths per layer and width w, separated by ;. In a path a pad name is that pad's centre, name@x,y a point inside that pad or via, vN(x,y) a via of type N, cw(c..) or ccw(c..) an arc to the next point about the centre after c; other vN are vias at no path point)
+3V3: C4.1 C7.2 C8.2 C9.2 C10.2 C11.2 C12.2 C15.2 C17.2 D1.2 J2.2 J3.1 R2.2 R3.2 R5.2 U1.2 U1.4 U3.1 U3.9 U3.24 U3.36 U3.48 U4.8 U4.13 | length 173.6
  L1 (SIGNAL) w0.25: C17.2 82.334,95.606 82.736,95.606 82.882,95.459 82.882,95.23 83.112,95 U4.8 ; U4.13 84.5,90.98 C15.2 ; 88.102,83.221 U3.9 ; 88.308,87.223 88.31,87.221 U3.1 88.809,87.609 89.071,87.871 U3.48 89.459,88.481 89.457,88.483 ; U3.24@94.909,81.346 94.959,81.346 U3.24 94.959,80.474 95.094,80.339 95.323,80.339 95.325,80.336 ; U3.36 96.091,87.221 96.238,87.367 96.238,87.609 96.235,87.612
  L1 (SIGNAL) w0.3: C15.2 84.452,90.923 84.452,90.152 v4(84.4,90.1) 86.59,90.1 88.19,91.7 89.124,91.7 90.975,93.552 R3.2 ; C9.2@86.888,81.658 87.393,81.658 87.569,81.833 87.569,83.045 87.744,83.22 88.101,83.22 ; 87.853,87.223 88.308,87.223 ; C12.2@89.107,89.151 89.457,88.801 89.457,88.483 ; 95.325,80.336 95.454,80.336 95.63,80.16 95.63,79.61 C10.2 ; 96.235,87.612 96.235,87.871 96.534,88.17 C11.2 ; C4.1 106.382,71.4 108.2,71.4 108.75,71.95 D1.2
  L1 (SIGNAL) w0.4: C7.2 85.409,87.278 86.699,87.263 C8.2 86.998,87.222 87.853,87.222 ; R2.2 94.431,93.54 R2.2@94.467,93.503
  L1 (SIGNAL) w0.5: 81.041,95.69 C17.2 82.25,96.95 ; 83.2,87.7 85.036,87.7 C7.2 ; 85.9,68.5 J3.1 85.9,72.5 ; C9.2@86.888,81.658 86.888,80.744 86.922,80.71 86.922,80.498 ; R2.2 94.41,95.365 ; C10.2 95.85,79.39 96.41,79.39 96.8,79 96.8,78.1 ; C11.2 98.37,88.17 ; R5.2 103.515,99.085
  L1 (SIGNAL) w0.8: 79.9,93.9 79.9,95.221 80.369,95.69 81.041,95.69 ; v4(81.6,87.7) 83.2,87.7 ; 82.25,96.95 82.25,98.45 82.9,99.1 83.7,99.1 ; 85.9,68.5 85.9,67.9 86.554,67.246 88.146,67.246 ; 85.9,72.5 85.9,73.7 ; 86.654,78.454 86.922,78.722 86.922,80.498 ; 94.41,95.365 v5(94.41,97.29) ; 96.2,75.8 96.2,77.1 96.8,77.7 96.8,78.1 ; 98.37,88.17 99.031,88.17 99.5,88.639 v3(99.5,89.2) ; J2.2 102.3,93.335 v3(102.3,92.4) 103.7,92.4 104.6,93.3 104.6,93.511 104.636,93.546 104.636,98.616 104.167,99.085 103.515,99.085
  L1 (SIGNAL) w1: 79.9,93.9 79.9,78.5 80.8,77.6 84.558,77.6 85.229,76.929 ; 80,87.7 v4(81.6,87.7) ; 83.7,99.1 93.6,99.1 94.41,98.29 v5(94.41,97.29) ; 85.9,73.7 85.9,76.258 85.229,76.929 ; 86.654,78.454 85.229,77.029 85.229,76.929 ; 88.156,67.256 v3(92.739,67.256) ; 96.2,75.8 v3(96.2,67.3) 105.792,67.3 106.378,67.886 C4.1
  L4 (SIGNAL) w0.4: v4(81.6,87.7) 81.6,89.3 82.4,90.1 v4(84.4,90.1)
  L4 (SIGNAL) w0.8: 98.038,98.4 101.4,98.4 102.3,97.5 v3(102.3,92.4)
  L4 (SIGNAL) w1: v3@92.783,67.3 v3(96.2,67.3) ; v5(94.41,97.29) 95.19,97.29 96.3,98.4 98.038,98.4 ; v3(99.5,89.2) 100.2,89.2 102.3,91.3 v3(102.3,92.4)
+5: C2.2 C3.1 FB1.2 U1.3
GND: C1.1 C2.1 C3.2 C4.2 C5.1 C6.1 C7.1 C8.1 C9.1 C10.1 C11.1 C12.1 C13.1 C14.1 C15.1 C16.2 C17.1 C18.1 J1.5 J2.3 J3.6 R1.1 R4.1 R7.1 U1.1 U3.8 U3.23 U3.35 U3.47 U3.49 U4.1 U4.9 U4.11 U4.18 U4.25 Y1.2 Y1.4 | length 59.2
  L1 (SIGNAL) w0.25: v3(81.1,94.4) v3@81.1,94.405 ; C17.1@82.222,94.938 C17.1 82.25,94.89 82.64,94.5 U4.9 84.9,94.5 v2(85.2,94.8) ; C16.2 82.281,92.729 82.857,92.729 83.003,92.875 83.003,93.288 83.215,93.5 U4.11 85,93.5 v2(85.2,93.7) ; C8.1 C8.1@86.861,86.1 ; 87,91.5 U4.18 ; U4.1 87.017,96.267 87.017,97.93 v3(87.035,97.948) ; 88.155,83.729 88.164,83.721 U3.8 ; 89.959,88.421 U3.47 89.959,86.721 v2(90.009,86.671) ; v2(94.409,82.271) 94.459,82.221 U3.23 94.459,80.513 94.46,80.512 ; v2(94.409,86.671) 94.459,86.721 U3.35 96.125,86.721 96.129,86.725 ; U4.18 U4.18@87,92.45 ; U4.18 U4.18@87,92.45 ; U4.18@87,92.45 87,92.458 87.004,92.454 U4.18@87,92.45
  L1 (SIGNAL) w0.3: v3@86.475,91 v3(86.5,91) 86.75,91 87,91.25 87,91.5 ; C9.1 86.87,82.679 86.87,83.12 87,83.25 87.479,83.729 88.155,83.729 ; 89.959,88.421 89.959,89.334 C12.1 ; 94.46,80.512 94.46,80.223 94.749,79.934 94.749,79.511 C10.1 94.756,79.496 94.756,78.988 95.267,78.477 95.822,78.477 v3(95.899,78.4) ; 96.129,86.725 96.595,86.725 97.016,87.146 97.545,87.146 C11.1 ; v3(106,88) 106.87,87.13 J1.5
  L1 (SIGNAL) w0.4: v3@81.1,94.405 81.633,94.938 C17.1@82.222,94.938
  L1 (SIGNAL) w0.5: v3(81,83) 81.054,83 81.244,82.81 C5.1 ; v3(81.2,92.8) 81.22,92.78 82.23,92.78 C16.2 ; v3(81.609,81.281) 81.61,81.283 82.982,81.283 Y1.4 ; v3(83,86) 83.054,86 83.283,86.229 C7.1 85.169,86.166 86.795,86.166 C8.1 ; Y1.2 84.348,80.27 84.348,78.924 v3(84.362,78.91) ; C15.1 85.497,90.987 86.487,90.987 v3(86.5,91) ; v3(85.725,81.735) 85.725,81.789 85.429,82.085 85.429,82.75 C6.1 86.736,82.81 86.859,82.687 C9.1 ; C18.1 88.883,92.724 88.893,92.734 89.31,92.734 89.793,93.217 89.793,93.812 v3(89.831,93.85) ; v3(89.968,90.325) 90.007,90.287 90.007,89.547 C12.1 ; v3(90.119,91.705) 90.119,91.741 90.504,92.126 R7.1 ; J3.6 92.155,70.205 92.155,72.075 v3(92.16,72.08) ; v3(92.791,76.265) C13.1@92.79,77.747 ; R4.1 97.271,79.779 v3(97.765,79.286) ; v3(97.6,99.45) 97.654,99.45 97.887,99.217 C14.1 ; v3(98.317,97.388) 98.317,97.334 98.885,96.766 98.885,96.754 99.238,96.4 100.5,96.4 101,95.9 J2.3 ; v3(106.6,77.9) 106.654,77.9 106.743,77.989 108.664,77.989 108.674,77.979 R1.1
  other v1: 81,71.4 82.4,71.4 83.9,71.4 94.2,72.1 81,73 82.5,73 83.9,73 92.8,73.5 94.2,73.5 81,74.6 82.5,74.6 83.9,74.6 92.8,75 94.2,75 81,76.1 82.5,76.1 83.9,76.1 106.6,76.6 81.4,79.1 106.5,79.1 98.1,84.1 99.5,84.1 81.1,84.7 82.5,84.7 102.8,88.4 104.2,88.4 81.5,91 107.4,91.1 108.8,91.1 107.4,92.6 108.8,92.6 107.3,93.9 108.7,93.9 107.3,95.4 108.7,95.4 90,96.5 92,96.5 83.6,97.7 85.3,97.7 90,97.7 92,97.7
  other v2: 90.009,82.271 91.109,82.271 92.209,82.271 93.309,82.271 90.009,83.371 91.109,83.371 92.209,83.371 93.309,83.371 94.409,83.371 90.009,84.471 91.109,84.471 92.209,84.471 93.309,84.471 94.409,84.471 90.009,85.571 91.109,85.571 92.209,85.571 93.309,85.571 94.409,85.571 91.109,86.671 92.209,86.671 93.309,86.671 86.3,93.7 86.3,94.8
  other v3: 103.671,77.122 103.692,78.857 105.047,78.921
  other v4: 105.735,74.86 106.968,74.875 85.74,94.336
IMU_CPOUT: C18.2 U4.20 | length 1.2
  L1 (SIGNAL) w0.25: U4.20 88.868,93.5 C18.2
IMU_INT: U3.45 U4.12 | length 15.2
  L1 (SIGNAL) w0.25: U4.12 83.746,93 83.696,92.95 83.696,92.596 83,91.9 83,89.9 83.6,89.3 86.5,89.3 88.2,91 90.5,91 90.959,90.541 U3.45
IMU_REGOUT: C16.1 U4.10 | length 1.6
  L1 (SIGNAL) w0.25: C16.1 82.26,93.75 82.75,93.75 83,94 U4.10
IMU_SCL: R2.1 U3.42 U4.23 | length 13.2
  L1 (SIGNAL) w0.25: U4.23 88.75,95 89,94.75 v4(91,94.75) ; U3.42 92.459,88.337 93.25,89.128 93.25,91.5 93.652,91.902 R2.1 93.652,94.253 93.25,94.655 v4(93.25,94.75)
  L4 (SIGNAL) w0.25: v4(91,94.75) v4(93.25,94.75)
IMU_SDA: R3.1 U3.43 U4.24 | length 12.3
  L1 (SIGNAL) w0.25: U4.24 92,95.5 92.25,95.25 92.587,94.913 R3.1 ; U3.43 91.959,88.959 92.505,89.505 R3.1@92.505,93.469
LED_PWR_K: D1.1 R1.2 | length 1.5
  L1 (SIGNAL) w0.3: D1.1 R1.2
MCU_BOOT0: R7.2 U3.44 | length 3.5
  L1 (SIGNAL) w0.25: U3.44 R7.2@91.459,91.374
MCU_LED_A: D2.2 U3.26 | length 1.6
  L1 (SIGNAL) w0.25: U3.26 97.171,82.221 D2.2
MCU_LED_K: D2.1 R4.2 | length 1.6
  L1 (SIGNAL) w0.25: R4.2 R4.2@98.264,80.799 ; D2.1@98.264,82.214 D2.1 D2.1@98.264,82.286
  L1 (SIGNAL) w0.3: R4.2@98.264,80.799 D2.1@98.264,82.214
MCU_NRST: C14.2 J2.1 R5.1 U3.7 | length 35.4
  L1 (SIGNAL) w0.25: v4(86.25,83.75) 86.263,83.75 86.734,84.221 U3.7 ; v3(100,97.45) 100,97.572 100.405,97.977 C14.2 101.645,99.217 101.645,97.329 102.27,96.704 J2.1
  L4 (SIGNAL) w0.25: v4(86.25,83.75) 86.25,87.75 87.2,88.7 96.1,88.7 100,92.6 v3(100,97.45)
MCU_OSC_IN: C5.2 U3.5 Y1.1 | length 10.3
  L1 (SIGNAL) w0.2: C5.2 83.319,82.116 83.659,81.776 83.659,80.528 83.413,80.282 Y1.1@83.339,80.282
  L1 (SIGNAL) w0.25: C5.2 83.366,82.858 83.366,84.575 84.012,85.221 U3.5
MCU_OSC_OUT: R6.2 U3.6 | length 4.2
  L1 (SIGNAL) w0.25: R6.2 85.284,84.411 85.593,84.721 88.532,84.721 U3.6
MCU_PA4: J3.2 U3.14 | length 12
  L1 (SIGNAL) w0.25: J3.2 87.15,77.65 89.959,80.459 U3.14
MCU_PA5: J3.3 U3.15 | length 11.7
  L1 (SIGNAL) w0.25: J3.3 88.4,77.9 90.459,79.959 U3.15
MCU_PA6: J3.4 U3.16 | length 11.4
  L1 (SIGNAL) w0.25: J3.4 89.65,78.15 90.959,79.459 U3.16
MCU_PA7: J3.5 U3.17 | length 11.1
  L1 (SIGNAL) w0.25: J3.5 90.9,78.764 91.459,79.322 U3.17
MCU_SWCLK: J2.5 U3.37 | length 9.7
  L1 (SIGNAL) w0.25: U3.37 94.959,91.459 97.696,94.196 99.145,94.196 99.585,94.635 J2.5
MCU_SWDIO: J2.4 U3.34 | length 11
  L1 (SIGNAL) w0.25: U3.34 98.321,86.221 101,88.9 J2.4
MCU_SWO: J2.6 U3.39 | length 10.6
  L1 (SIGNAL) w0.25: U3.39 93.959,89.834 v4(94.155,90.03) ; v4(96,90.5) 99.25,90.5 99.73,90.98 J2.6
  L4 (SIGNAL) w0.25: v4(94.155,90.03) 94.17,90.03 94.64,90.5 v4(96,90.5)
MCU_VCAP1: C13.2 U3.22 | length 3.4
  L1 (SIGNAL) w0.25: 93.959,80.541 U3.22
  L1 (SIGNAL) w0.3: 93.959,80.541 93.959,77.979 C13.2
USB_D_N: J1.2 U3.32 | length 12.4
  L1 (SIGNAL) w0.26: U3.32 95.873,85.221 95.892,85.239 100.397,85.239 106.714,85.239 106.748,85.274 107.816,85.274 J1.2
USB_D_P: J1.3 U3.33 | length 12.4
  L1 (SIGNAL) w0.26: U3.33 95.873,85.721 95.892,85.702 100.588,85.702 106.522,85.702 106.556,85.737 107.816,85.737 J1.3
VBUS: C1.2 FB1.1 J1.1
XTAL_IN: C6.2 R6.1 Y1.3 | length 2.7
  L1 (SIGNAL) w0.25: Y1.3 84.449,81.399 C6.2 84.491,82.852 84.491,83.817 R6.1
pads on no net: J1.4 J1.6 J1.7 J1.8 J1.9 J1.10 J1.11 J2. J3.7 J3.8 U3.2 U3.3 U3.4 U3.10 U3.11 U3.12 U3.13 U3.18 U3.19 U3.20 U3.21 U3.25 U3.27 U3.28 U3.29 U3.30 U3.31 U3.38 U3.40 U3.41 U3.46 U4.2 U4.3 U4.4 U4.5 U4.6 U4.7 U4.14 U4.15 U4.16 U4.17 U4.19 U4.21 U4.22

## Polygon pours and split planes (outlines as drawn)
+5 on L1 (SIGNAL) "+5_L01_P001" (solid, pour order 1): 101.8,82.9 101.6,82.7 100.5,82.7 99.5,81.7 99.5,78.2 98,76.7 98,75.2 98.3,74.9 99.5,74.9 99.8,75.2 99.8,76.3 100.3,76.8 100.8,76.8 101.2,77.2 101.2,80.7 101.8,81.3 103.6,81.3 103.7,81.4 103.7,84.4 103.5,84.6 102,84.6 101.8,84.4
VBUS on L1 (SIGNAL) "VBUS_L01_P000" (solid, pour order 0): 104,84.8 103.9,84.7 103.9,81.5 104.1,81.3 105.8,81.3 106.2,81.7 106.2,84 106.4,84.2 108.6,84.2 108.7,84.3 108.7,84.7 108.6,84.8
GND on L1 (SIGNAL) "GND_L01_P019" (solid, pour order 19): 107.3,72.4 107.5,72.6 107.5,75.6 107.25,75.85 105.95,75.85 105.6,76.2 105.6,80.85 105.35,81.1 101.95,81.1 101.351,80.501 101.351,77.299 101.6,77.05 102.3,77.05 102.8,76.55 102.8,75.25 102.95,75.1 104.25,75.1 105.506,73.844 105.506,72.544 105.65,72.4
+3V3 on L1 (SIGNAL) "+3V3_L01_P002" (solid, pour order 2): 99.8,68.5 102.8,68.5 103.2,68.9 103.2,70 103.6,70.4 107.1,70.4 107.3,70.6 107.3,71.8 107,72.1 102.6,72.1 101.9,72.8 101.9,76.3 101.9,76.4 101.8,76.5 100.7,76.5 100.6,76.4 100.6,71.7 99.5,70.6 99.5,68.8
GND on L2 (GND) "GND_L02_P014" (solid, pour order 14): 78,68 ccw(c80,68) 80,66 109,66 ccw(c109,68) 111,68 111,98 ccw(c109,98) 109,100 80,100 ccw(c80,98) 78,98
GND on L2 (GND) "GND_L02_P013" (solid, pour order 13): 78,68 ccw(c80,68) 80,66 109,66 ccw(c109,68) 111,68 111,98 ccw(c109,98) 109,100 80,100 ccw(c80,98) 78,98
GND on L3 (GND) "GND_L03_P016" (solid, pour order 16): 78,68 ccw(c80,68) 80,66 109,66 ccw(c109,68) 111,68 111,98 ccw(c109,98) 109,100 80,100 ccw(c80,98) 78,98

## Silkscreen, mask and mechanical layers (free items; w line width, h text height)
Top Overlay:
  text "SWD" at 102.254,89.354 h1
  text "USB" at 107.154,79.854 h1
  text "Designed By: Habib Ur Rehman" at 80.017,73.75 h0.7 r90
  text "GPIO" at 87.154,71.754 h1
Mechanical 1:
  lines w0.254: 77,66.27 ccw(c78.27,66.27) 78.27,65 110.73,65 ccw(c110.73,66.27) 112,66.27 112,99.73 ccw(c110.73,99.73) 110.73,101 78.27,101 ccw(c78.27,99.73) 77,99.73 77,96 77,66.27

## Text inside footprints (layer, text, board x,y; h text height)
D1: Top Overlay "+" at 109.25,74.7 h0.7 r270
D2: Top Overlay "+" at 97.4,83.45 h0.7 r180